# EAGLE board uno (EAGLE 6.1)
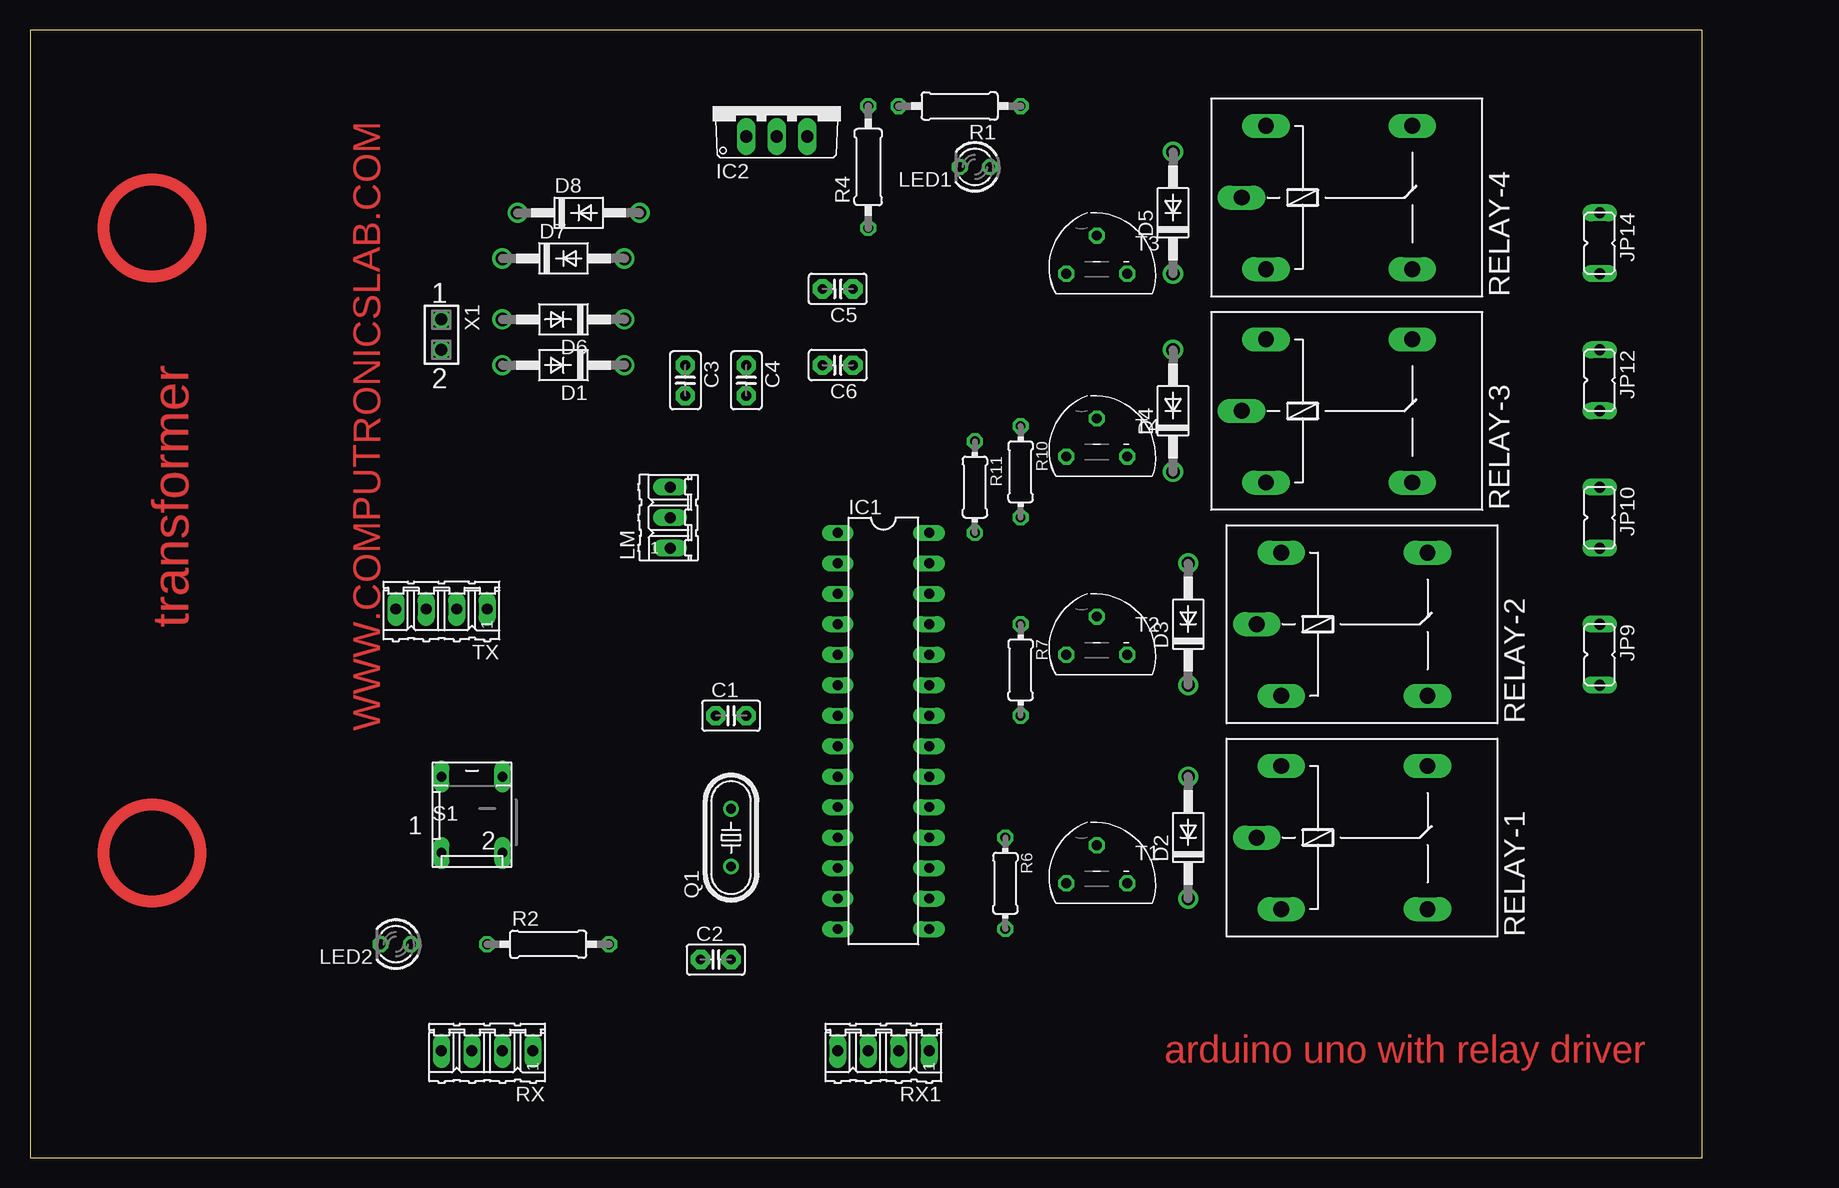
[diagram p0: board, top side]
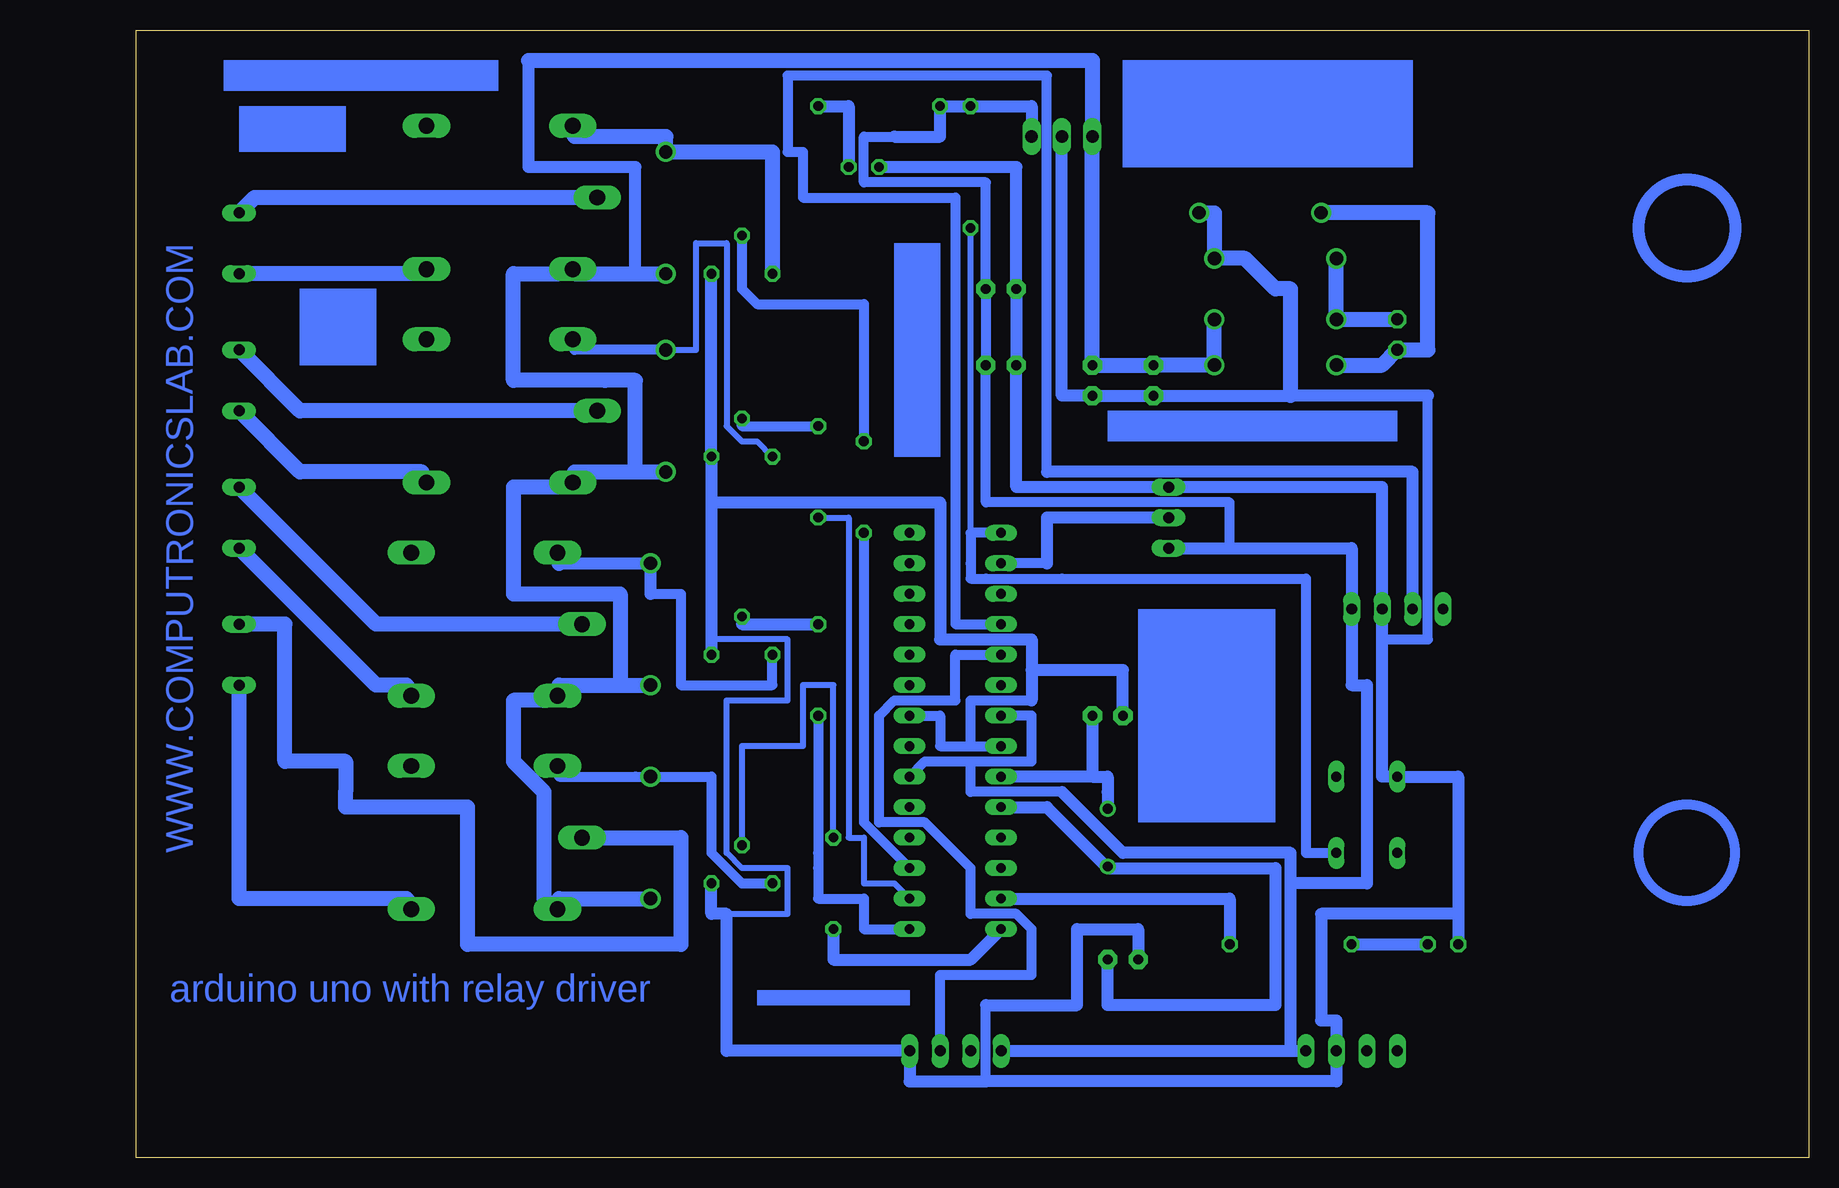
[diagram p1: board, bottom side, seen from below]

Size 139.37 x 93.97 mm. Coordinates in mm from the lower left corner, seen from the top.
Outline: 0,0 139.37,0 139.37,93.97 0,93.97 0,0
Copper layers (1*16): Top 0.035mm / dielectric 1.5mm / Bottom 0.035mm
Design rules: minimum track width 20mil, minimum drill 24mil, track to track 8mil, track to pad 8mil, pad to pad 8mil, via to via 8mil, smd to smd 8mil, copper to edge 40mil, drill to drill 8mil, minimum pad ring 10mil, minimum via ring 8mil, stop-mask expansion 4mil, vias tented up to drill 0mil, thermal gap 10mil

## Footprints (pad centres in the part's own frame; a part is rotated, then mirrored left to right if it is on the bottom)
C2.5-2 = drill 0.813 pad 1.6 octagon: 1 -1.27,0; 2 1.27,0
DO41-10 = drill 1.118: A 5.08,0; C -5.08,0
DIL28-3 = drill 0.813 long: 1 -16.51,-3.81; 2 -13.97,-3.81; 3 -11.43,-3.81; 4 -8.89,-3.81; 5 -6.35,-3.81; 6 -3.81,-3.81; 7 -1.27,-3.81; 8 1.27,-3.81; 9 3.81,-3.81; 10 6.35,-3.81; 11 8.89,-3.81; 12 11.43,-3.81; 13 13.97,-3.81; 14 16.51,-3.81; 15 16.51,3.81; 16 13.97,3.81; 17 11.43,3.81; 18 8.89,3.81; 19 6.35,3.81; 20 3.81,3.81; 21 1.27,3.81; 22 -1.27,3.81; 23 -3.81,3.81; 24 -6.35,3.81; 25 -8.89,3.81; 26 -11.43,3.81; 27 -13.97,3.81; 28 -16.51,3.81
TO220V = drill 1.016 long: 1 -2.54,-2.54; 2 0,-2.54; 3 2.54,-2.54
JP1 = drill 0.914 long: 1 0,-2.54; 2 0,2.54
LED3MM = drill 0.813 octagon: A -1.27,0; K 1.27,0
03P = drill 0.914 long: 1 -2.54,0; 2 0,0; 3 2.54,0
HC49/S = drill 0.813: 1 -2.413,0; 2 2.413,0
0207/10 = drill 0.813 octagon: 1 -5.08,0; 2 5.08,0
0204/7 = drill 0.813 octagon: 1 -3.81,0; 2 3.81,0
G5LE = drill 1.321 long: 1 -7.493,-5.969; 2 -7.493,5.969; O 4.699,5.969; P -9.525,0; S 4.699,-5.969
04P = drill 0.914 long: 1 -3.81,0; 2 -1.27,0; 3 1.27,0; 4 3.81,0
DP-02 = drill 0.813 long: 1 -2.54,-2.54; 2 2.54,-2.54; 3 2.54,3.81; 4 -2.54,3.81
TO92 = drill 0.813 octagon: 1 2.54,-1.27; 2 0,1.905; 3 -2.54,-1.27
SSW-101-02-S-D = drill 1 pad 1.5 octagon: 1 0,-1.27; 2 0,1.27

## Placement (x,y rotation side)
C1  22pf  [C2.5-2]  58.42,36.83 0 top
C2  22pf  [C2.5-2]  57.15,16.51 0 top
C3  470uf  [C2.5-2]  54.61,64.77 270 top
C4  0.1uf  [C2.5-2]  59.69,64.77 270 top
C5  0.1uf  [C2.5-2]  67.31,72.39 180 top
C6  4.7uf  [C2.5-2]  67.31,66.04 180 top
D1  1N4007  [DO41-10]  44.45,66.04 180 top
D2  1N4007  [DO41-10]  96.52,26.67 90 top
D3  1N4007  [DO41-10]  96.52,44.45 90 top
D4  1N4007  [DO41-10]  95.25,62.23 90 top
D5  1N4007  [DO41-10]  95.25,78.74 90 top
D6  1N4007  [DO41-10]  44.45,69.85 180 top
D7  1N4007  [DO41-10]  44.45,74.93 0 top
D8  1N4007  [DO41-10]  45.72,78.74 0 top
IC1  ATMEGA328  [DIL28-3]  71.12,35.56 270 top
IC2  7805  [TO220V]  62.23,87.63 0 top
JP9  AC CONNECTOR  [JP1]  130.81,41.91 180 top
JP10  AC CONNECTOR  [JP1]  130.81,53.34 180 top
JP12  AC CONNECTOR  [JP1]  130.81,64.77 180 top
JP14  AC CONNECTOR  [JP1]  130.81,76.2 180 top
LED1  [LED3MM]  78.74,82.55 180 top
LED2  [LED3MM]  30.48,17.78 180 top
LM  35  [03P]  53.34,53.34 90 top
Q1  12MHZ  [HC49/S]  58.42,26.67 90 top
R1  220R  [0207/10]  77.47,87.63 180 top
R2  330R  [0207/10]  43.18,17.78 0 top
R4  10K  [0207/10]  69.85,82.55 90 top
R6  5.6K  [0204/7]  81.28,22.86 270 top
R7  5.6K  [0204/7]  82.55,40.64 270 top
R10  5.6K  [0204/7]  82.55,57.15 270 top
R11  5.6K  [0204/7]  78.74,55.88 270 top
RELAY-1  12V  [G5LE]  111.76,26.67 0 top
RELAY-2  12V  [G5LE]  111.76,44.45 0 top
RELAY-3  12V  [G5LE]  110.49,62.23 0 top
RELAY-4  12V  [G5LE]  110.49,80.01 0 top
RX  [04P]  38.1,8.89 180 top
RX1  [04P]  71.12,8.89 180 top
S1  [DP-02]  36.83,27.94 0 top
T1  BC547  [TO92]  88.9,24.13 0 top
T2  BC547  [TO92]  88.9,43.18 0 top
T3  BC547  [TO92]  88.9,74.93 0 top
T4  BC547  [TO92]  88.9,59.69 0 top
TX  [04P]  34.29,45.72 180 top
X1  hole  [SSW-101-02-S-D]  34.29,68.58 180 top

## Library data of the parts
C1-C6 = capacitor-wima
D1-D8 = diode
IC1 = quantum-research-group; OC_FARNELL: unknown; OC_NEWARK: unknown
IC2 = linear
JP9 JP10 JP12 JP14 = jumper
LED1 LED2 = led
LM RX RX1 TX = con-amp-quick; OC_FARNELL: unknown; OC_NEWARK: unknown
Q1 = crystal; OC_FARNELL: 1667008; OC_NEWARK: unknown
R1 R2 R4 R6 R7 R10 R11 = rcl
RELAY-1-RELAY-4 = relay; OC_FARNELL: unknown; OC_NEWARK: unknown
S1 = switch-dil; MPN: MCDP02; OC_FARNELL: 1255233; OC_NEWARK: 26M1095
T1-T4 = transistor
X1 = con-samtec; MPN: SSW-101-02-S-D; OC_FARNELL: unknown; OC_NEWARK: 82P1456

## Nets
N$1: C1.2 IC1.9 Q1.2
N$2: C2.2 IC1.10 Q1.1
N$4: C5.1 C6.1 IC1.7 IC1.20 IC2.3 LM.1 R1.2 R4.2 RX1.4 RX.1 TX.1
N$6: LED1.A R1.1
N$7: C3.1 C4.1 D1.C D2.C D3.C D4.C D5.C D6.C IC2.1 RELAY-1.1 RELAY-2.1 RELAY-3.1 RELAY-4.1
N$8: IC1.2 LM.2
N$9: IC1.5 RX1.2
N$10: D6.A D7.C X1.1
N$11: IC1.4 TX.3
N$12: D1.A D8.C X1.2
N$21: IC1.13 R2.2
N$28: D2.A RELAY-1.2 T1.3
N$29: R7.1 T2.2
N$30: R6.1 T1.2
N$31: IC1.1 R4.1 S1.2
N$32: LED2.A R2.1
N$35: JP9.2 RELAY-1.S
N$36: JP9.1 RELAY-1.P
N$38: JP10.2 RELAY-2.S
N$39: JP10.1 RELAY-2.P
N$41: IC1.14 R6.2
N$42: D3.A RELAY-2.2 T2.3
N$43: D4.A RELAY-3.2 T4.3
N$45: R11.1 T3.2
N$46: R10.1 T4.2
N$49: JP12.2 RELAY-3.S
N$50: JP12.1 RELAY-3.P
N$51: JP14.2 RELAY-4.S
N$53: JP14.1 RELAY-4.P
N$55: C1.1 C2.1 C3.2 C4.2 C5.2 C6.2 D7.A D8.A IC1.8 IC1.22 IC2.2 LED1.K LED2.K LM.3 RX1.1 RX.2 S1.4 T1.1 T2.1 T3.1 T4.1 TX.2
N$56: IC1.16 R10.2
N$57: IC1.17 R11.2
N$58: D5.A RELAY-4.2 T3.3
N$59: IC1.15 R7.2

## Tracks (layer width: path | path; a pad name or v marks a point on that pad's centre or on a via)
N$1
  Bottom 1.016: C1.2 59.69,31.75 | 59.69,31.75 58.42,31.75 58.42,30.48 Q1.2 | 59.69,31.75 IC1.9
N$2
  Bottom 0.508: 58.42,24.13 Q1.1
  Bottom 1.016: IC1.10 63.5,29.21 58.42,24.13 44.45,24.13 44.45,12.7 58.42,12.7 C2.2
N$4
  Bottom 0.813: IC1.7 64.77,36.83 64.77,33.02 69.85,33.02 | 69.85,33.02 73.66,33.02 IC1.20 | 69.85,33.02 69.85,30.48 62.23,30.48 | 48.26,50.8 48.26,54.61 68.58,54.61 C6.1 C5.1 68.58,81.28 78.74,81.28 78.74,85.09 76.2,85.09
  Bottom 1.016: RX1.4 43.18,8.89 | 43.18,8.89 RX.1 | 62.23,30.48 57.15,25.4 43.18,25.4 43.18,22.86 | 43.18,8.89 43.18,22.86 | IC2.3 64.77,87.63 R4.2 R1.2 72.39,85.09 76.2,85.09 | LM.1 48.26,50.8 38.1,50.8 TX.1 38.1,39.37 36.83,39.37 36.83,22.86 43.18,22.86
N$6
  Bottom 1.016: LED1.A 80.01,87.63 R1.1
N$7
  Bottom 0.508: 104.14,21.59 RELAY-1.1
  Bottom 1.016: 106.68,91.44 106.68,82.55 97.79,82.55 97.79,73.66
  Bottom 1.27: D6.C D1.C C3.1 C4.1 IC2.1 59.69,91.44 106.68,91.44 | 104.14,21.59 D2.C | 99.06,39.37 104.14,39.37 RELAY-2.1 105.41,38.1 107.95,38.1 107.95,33.02 105.41,30.48 105.41,21.59 RELAY-1.1 | 99.06,39.37 D3.C | D5.C 97.79,73.66 102.87,73.66 RELAY-4.1 104.14,73.66 107.95,73.66 107.95,64.77 100.33,64.77 97.79,64.77 97.79,57.15 | 97.79,57.15 102.87,57.15 RELAY-3.1 104.14,55.88 107.95,55.88 107.95,46.99 99.06,46.99 99.06,39.37 | 97.79,57.15 D4.C
N$8
  Bottom 0.813: 63.5,49.53 IC1.2
  Bottom 1.016: 63.5,49.53 63.5,53.34 LM.2
N$9
  Bottom 0.813: IC1.5 71.12,41.91 71.12,38.1 76.2,38.1 77.47,36.83 77.47,27.94 73.66,27.94 69.85,24.13 69.85,20.32 66.04,20.32 64.77,19.05 64.77,15.24 72.39,15.24 RX1.2
N$10
  Bottom 1.27: X1.1 D6.A D7.C
N$11
  Bottom 0.813: IC1.4 71.12,44.45 71.12,80.01 83.82,80.01 83.82,83.82 85.09,83.82 85.09,90.17 63.5,90.17 63.5,57.15
  Bottom 1.016: 63.5,57.15 33.02,57.15 TX.3
N$12
  Bottom 1.27: D1.A 35.56,66.04 X1.2 31.75,67.31 31.75,78.74 D8.C
N$21
  Bottom 1.016: R2.2 48.26,21.59 IC1.13
N$28
  Bottom 0.813: T1.3 88.9,22.86 91.44,25.4 91.44,31.75 D2.A 97.79,31.75 104.14,31.75 RELAY-1.2
N$29
  Bottom 0.508: 88.9,44.45 T2.2
  Bottom 1.016: 88.9,44.45 R7.1
N$30
  Bottom 0.508: T1.2 88.9,34.29 87.63,34.29 83.82,34.29 83.82,38.1 83.82,39.37 81.28,39.37 R6.1
N$31
  Bottom 0.508: 69.85,52.07 R4.1
  Bottom 0.813: S1.2 41.91,25.4 41.91,31.75 41.91,48.26 62.23,48.26 68.58,48.26 69.85,48.26 69.85,49.53 69.85,52.07 IC1.1
N$32
  Bottom 1.016: R2.1 LED2.A
N$35
  Bottom 1.27: JP9.2 130.81,21.59 116.84,21.59 RELAY-1.S
N$36
  Bottom 1.27: JP9.1 127,44.45 127,33.02 121.92,33.02 121.92,30.48 121.92,29.21 111.76,29.21 111.76,17.78 93.98,17.78 93.98,26.67 RELAY-1.P
N$38
  Bottom 1.27: JP10.2 119.38,39.37 116.84,39.37 RELAY-2.S
N$39
  Bottom 1.27: JP10.1 119.38,44.45 RELAY-2.P
N$41
  Bottom 1.016: IC1.14 69.85,16.51 81.28,16.51 R6.2
N$42
  Bottom 0.813: T2.3 86.36,39.37 93.98,39.37 93.98,46.99 96.52,46.99
  Bottom 1.016: 104.14,49.53 D3.A 96.52,46.99
  Bottom 1.27: 104.14,49.53 RELAY-2.2
N$43
  Bottom 0.508: T4.3 87.63,59.69 88.9,59.69 90.17,60.96 90.17,76.2 92.71,76.2 92.71,67.31 D4.A
  Bottom 0.813: D4.A 102.87,67.31 RELAY-3.2
N$45
  Bottom 0.813: R11.1 78.74,71.12 87.63,71.12 88.9,72.39 T3.2
N$46
  Bottom 0.813: R10.1 88.9,60.96 T4.2
N$49
  Bottom 1.27: JP12.2 125.73,57.15 115.57,57.15 RELAY-3.S
N$50
  Bottom 1.27: JP12.1 125.73,62.23 RELAY-3.P
N$51
  Bottom 1.27: JP14.2 115.57,73.66 RELAY-4.S
N$53
  Bottom 1.27: JP14.1 129.54,80.01 RELAY-4.P
N$55
  Bottom 0.508: 64.77,38.1 64.77,40.64 | 91.44,43.18 85.09,43.18 85.09,38.1 90.17,38.1 90.17,25.4 88.9,24.13 85.09,24.13 85.09,20.32 90.17,20.32
  Bottom 0.813: 69.85,34.29 IC1.8 | IC1.22 72.39,36.83 72.39,34.29 69.85,34.29 | 64.77,38.1 68.58,38.1 69.85,38.1 69.85,36.83 69.85,34.29 | 68.58,6.35 68.58,12.7 | 31.75,63.5 31.75,43.18 35.56,43.18
  Bottom 1.016: 64.77,40.64 57.15,40.64 C1.1 | 91.44,54.61 T4.1 T3.1 | 91.44,54.61 91.44,43.18 T2.1 | 64.77,38.1 64.77,43.18 72.39,43.18 72.39,54.61 91.44,54.61 | T1.1 91.44,20.32 90.17,20.32 90.17,8.89 RX1.1 74.93,6.35 68.58,6.35 39.37,6.35 RX.2 39.37,11.43 40.64,11.43 40.64,20.32 29.21,20.32 | C2.1 55.88,19.05 60.96,19.05 60.96,12.7 68.58,12.7 | IC2.2 62.23,63.5 C4.2 C3.2 43.18,63.5 31.75,63.5 | LED1.K 66.04,82.55 C5.2 C6.2 66.04,55.88 LM.3 35.56,55.88 TX.2 35.56,43.18 35.56,31.75 S1.4 29.21,31.75 29.21,20.32 | 29.21,20.32 LED2.K
  Bottom 1.27: D8.A 49.53,78.74 D7.A 46.99,74.93 44.45,72.39 43.18,72.39 43.18,63.5
N$56
  Bottom 0.508: IC1.16 76.2,22.86 78.74,22.86 78.74,26.67 80.01,26.67 80.01,53.34 R10.2
N$57
  Bottom 0.813: IC1.17 78.74,27.94 R11.2
N$58
  Bottom 1.27: T3.3 86.36,83.82 D5.A 95.25,85.09 102.87,85.09 RELAY-4.2
N$59
  Bottom 0.813: IC1.15 78.74,19.05 78.74,21.59 82.55,21.59 82.55,24.13 82.55,25.4 R7.2
(copper drawn outside any net)
  shapes: Bottom area x8, Bottom circle x2, Top circle x2

## Text on the board
Top: transformer | WWW.COMPUTRONICSLAB.COM | arduino uno with relay driver
Bottom: WWW.COMPUTRONICSLAB.COM | arduino uno with relay driver